# EAGLE board dev (EAGLE 4.16)
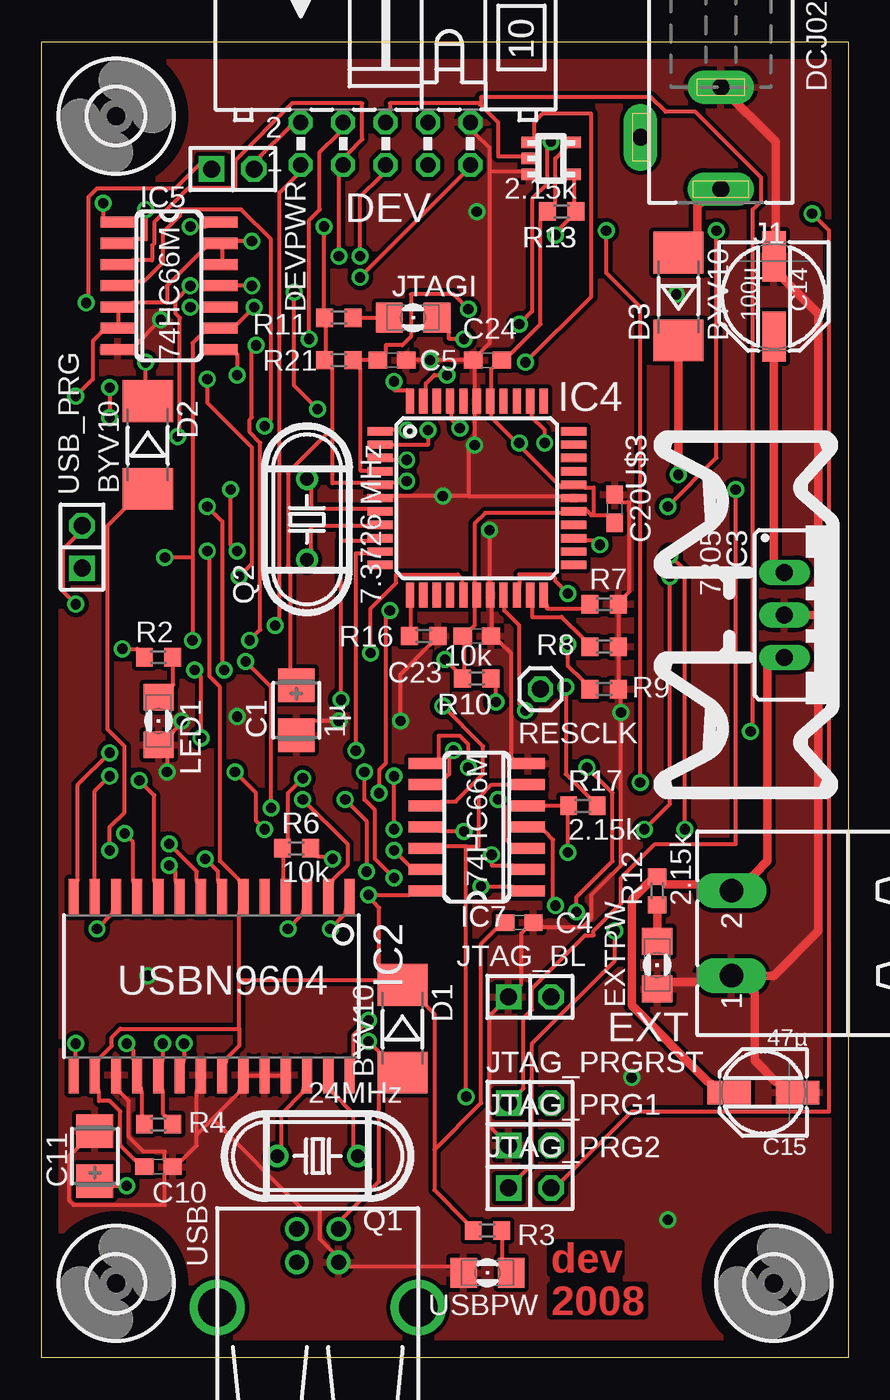
[diagram p0: board, top side]
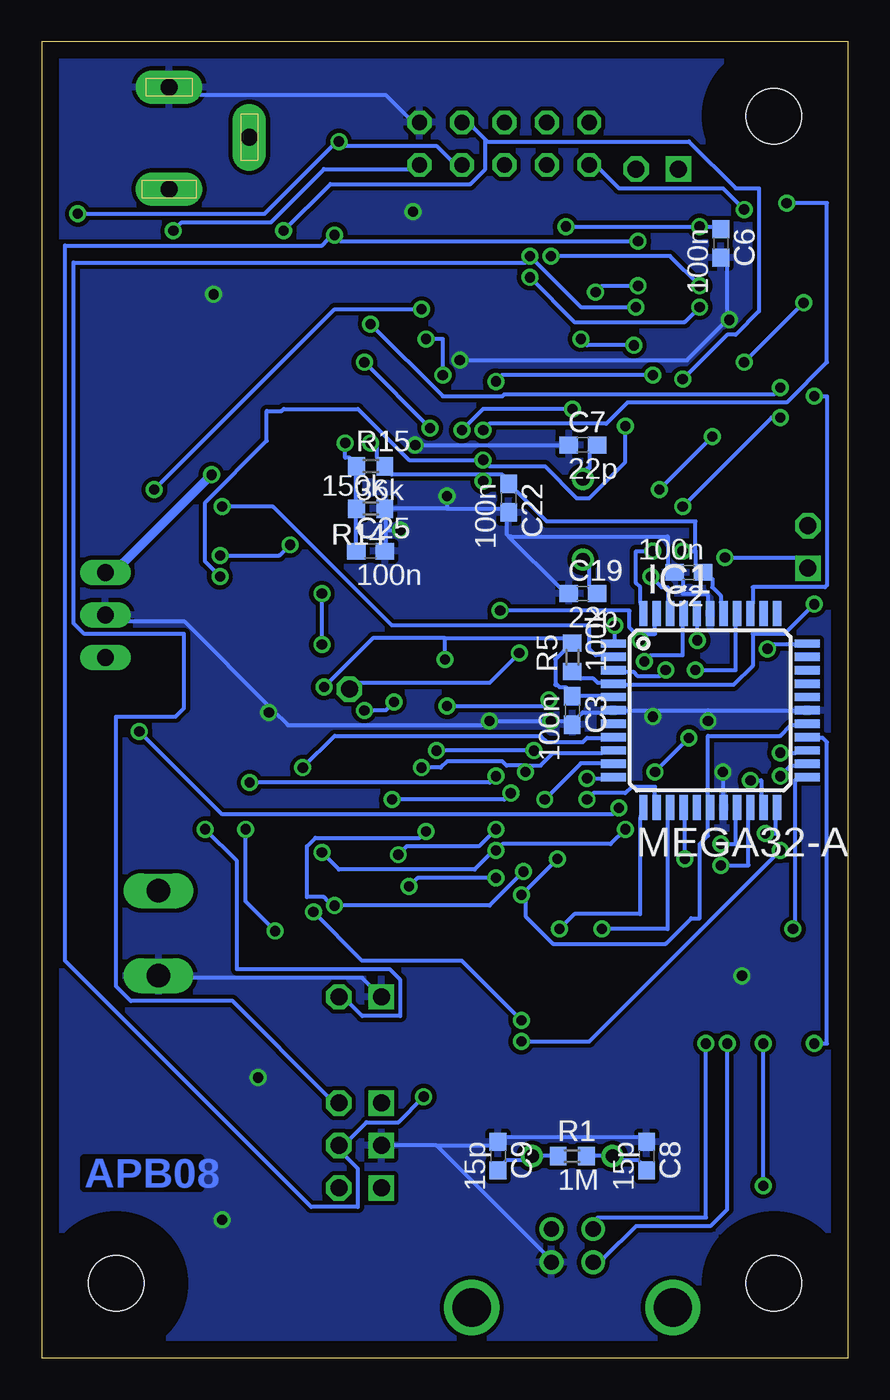
[diagram p1: board, bottom side, seen from below]

Size 48.26 x 78.74 mm. Coordinates in mm from the lower left corner, seen from the top.
Outline: 0,0 0,78.74 48.26,78.74 48.26,0 0,0
Copper layers (1*16): Top 0.035mm / dielectric 1.5mm / Bottom 0.035mm
Design rules "olimex": minimum track width 10mil, minimum drill 24mil, track to track 10mil, track to pad 10mil, pad to pad 10mil, via to via 10mil, smd to smd 10mil, copper to edge 40mil, drill to drill 10mil, minimum pad ring 10mil, minimum via ring 8mil, stop-mask expansion 0mil, vias tented up to drill 0mil, thermal gap 10mil
Net classes: 1 supply: width 0.508 mm

## Footprints (pad centres in the part's own frame; a part is rotated, then mirrored left to right if it is on the bottom)
CT3528 = smd 2 x 2.2: + 1.5,0; - -1.5,0
C0603 = smd 1.1 x 1: 1 -0.85,0; 2 0.85,0
PANASONIC_D = smd 3 x 1.4: + 2.4,0; - -2.4,0
PANASONIC_C = smd 2.6 x 1.4: + 2.05,0; - -2.05,0
MELF-MLL41 = smd 2.5 x 3: A 2.625,0; C -2.625,0
ML10L = drill 0.914 octagon: 1 -5.08,-1.27; 2 -5.08,1.27; 3 -2.54,-1.27; 4 -2.54,1.27; 5 0,-1.27; 6 0,1.27; 7 2.54,-1.27; 8 2.54,1.27; 9 5.08,-1.27; 10 5.08,1.27
1X02 = drill 1.016 square: 1 -1.27,0 | drill 1.016 octagon: 2 1.27,0
MSTBA2 = drill 1.397 long: 1 -2.54,5.08; 2 2.54,5.08
1206 = smd 1.6 x 1.803: A -1.422,0; C 1.422,0
3,3 = hole 3.3: 0,0
TQFP44 = smd 1.5 x 0.5: 1 -5.8,4; 2 -5.8,3.2; 3 -5.8,2.4; 4 -5.8,1.6; 5 -5.8,0.8; 6 -5.8,0; 7 -5.8,-0.8; 8 -5.8,-1.6; 9 -5.8,-2.4; 10 -5.8,-3.2; 11 -5.8,-4; 23 5.8,-4; 24 5.8,-3.2; 25 5.8,-2.4; 26 5.8,-1.6; 27 5.8,-0.8; 28 5.8,0; 29 5.8,0.8; 30 5.8,1.6; 31 5.8,2.4; 32 5.8,3.2; 33 5.8,4 | smd 0.5 x 1.5: 12 -4,-5.8; 13 -3.2,-5.8; 14 -2.4,-5.8; 15 -1.6,-5.8; 16 -0.8,-5.8; 17 0,-5.8; 18 0.8,-5.8; 19 1.6,-5.8; 20 2.4,-5.8; 21 3.2,-5.8; 22 4,-5.8; 34 4,5.8; 35 3.2,5.8; 36 2.4,5.8; 37 1.6,5.8; 38 0.8,5.8; 39 0,5.8; 40 -0.8,5.8; 41 -1.6,5.8; 42 -2.4,5.8; 43 -3.2,5.8; 44 -4,5.8
SO28-3 = smd 0.61 x 2.21: 1 -8.255,-5.315; 2 -6.985,-5.315; 3 -5.715,-5.315; 4 -4.445,-5.315; 5 -3.175,-5.315; 6 -1.905,-5.315; 7 -0.635,-5.315; 8 0.635,-5.315; 9 1.905,-5.315; 10 3.175,-5.315; 11 4.445,-5.315; 12 5.715,-5.315; 13 6.985,-5.315; 14 8.255,-5.315; 15 8.255,5.315; 16 6.985,5.315; 17 5.715,5.315; 18 4.445,5.315; 19 3.175,5.315; 20 1.905,5.315; 21 0.635,5.315; 22 -0.635,5.315; 23 -1.905,5.315; 24 -3.175,5.315; 25 -4.445,5.315; 26 -5.715,5.315; 27 -6.985,5.315; 28 -8.255,5.315
78XXS = drill 1.016 long: GND 0,-2.54; IN -2.54,-2.54; OUT 2.54,-2.54
SO14 = smd 0.66 x 2.032: 1 -3.81,-3.073; 2 -2.54,-3.073; 3 -1.27,-3.073; 4 0,-3.073; 5 1.27,-3.073; 6 2.54,-3.073; 7 3.81,-3.073; 8 3.81,3.073; 9 2.54,3.073; 10 1.27,3.073; 11 0,3.073; 12 -1.27,3.073; 13 -2.54,3.073; 14 -3.81,3.073
SOT23-5 = smd 0.69 x 0.99: 1 -0.95,-1.29; 2 0,-1.29; 3 0.95,-1.29; 4 0.95,1.3; 5 -0.95,1.3
DCJ0202 = drill 1 pad 2 long: 1 0,3.1; 2 4.8,0; 3 0,-3
HC49U70 = drill 0.813 round: 1 -2.413,0; 2 2.413,0
R0603 = smd 1 x 1.1: 1 -0.85,0; 2 0.85,0
1X01 = drill 1.016 octagon: 1 0,0
USB-B-H = drill 0.914 round: D+ 0,1.25; D- 1.981,1.25; GND 0,-1.25; VBUS 1.981,-1.25 | drill 2.286 round: P$1 -2.718,-6.02; P$2 -2.718,6.02

## Placement (x,y rotation side)
C1  1µ  [CT3528]  15.24,38.73 90 top
C2  100n  [C0603]  9.53,46.99 180 bottom
C3  100n  [C0603]  16.51,38.73 270 bottom
C4  100n  [C0603]  28.57,26.04 0 top
C5  100n  [C0603]  20.95,59.69 0 top
C6  100n  [C0603]  7.62,66.67 270 bottom
C7  22p  [C0603]  15.88,54.61 0 bottom
C8  15p  [C0603]  12.06,12.06 270 bottom
C9  15p  [C0603]  20.95,12.06 270 bottom
C10  100n  [C0603]  6.99,11.43 0 top
C11  1µ  [CT3528]  3.17,12.06 270 top
C14  100µ  [PANASONIC_D]  43.81,63.5 270 top
C15  47µ  [PANASONIC_C]  43.18,15.88 180 top
C19  22p  [C0603]  15.88,45.72 0 bottom
C20  100n  [C0603]  34.29,50.8 90 top
C22  100n  [C0603]  20.32,51.44 270 bottom
C23  100n  [C0603]  26.04,43.18 0 top
C24  100n  [C0603]  26.67,59.69 180 top
C25  100n  [C0603]  28.57,48.26 0 bottom
D1  BYV10  [MELF-MLL41]  21.59,19.68 270 top
D2  BYV10  [MELF-MLL41]  6.35,54.61 270 top
D3  BYV10  [MELF-MLL41]  38.1,63.5 90 top
DEV  [ML10L]  20.57,72.64 0 top
DEVPWR  [1X02]  11.43,71.12 0 top
EXT  MSTBA2  [MSTBA2]  46.35,25.4 90 top
EXTPW  [1206]  36.83,23.5 270 top
H1  MOUNT-HOLE3.3  [3,3]  4.45,74.3 0 top
H2  MOUNT-HOLE3.3  [3,3]  4.45,4.45 0 top
H3  MOUNT-HOLE3.3  [3,3]  43.81,4.45 0 top
IC1  MEGA32-A  [TQFP44]  8.26,38.73 0 bottom
IC2  USBN9604  [SO28-3]  10.16,22.23 180 top
IC3  7805  [78XXS]  46.99,44.45 270 top
IC4  MEGA16-A  [TQFP44]  26.04,51.44 0 top
IC5  74HC66M  [SO14]  7.62,64.14 270 top
IC6  74HC1G66DBV  [SOT23-5]  30.48,71.75 270 top
IC7  74HC66M  [SO14]  26.04,31.75 90 top
J1  DCJ0202  [DCJ0202]  40.64,73.03 180 top
JTAG_BL  [1X02]  29.21,21.59 0 top
JTAG_PRG1  [1X02]  29.21,12.7 0 top
JTAG_PRG2  [1X02]  29.21,10.16 0 top
JTAG_PRGRST  [1X02]  29.21,15.24 0 top
JTAGI  [1206]  22.23,62.23 0 top
LED1  [1206]  6.99,38.1 270 top
Q1  24MHz  [HC49U70]  16.51,12.06 180 top
Q2  7.3726 MHz  [HC49U70]  15.88,50.16 90 top
R1  1M  [R0603]  16.51,12.06 0 bottom
R2  2.15k  [R0603]  6.99,41.91 180 top
R3  2.15k  [R0603]  26.67,7.62 180 top
R4  1.5k  [R0603]  6.99,13.97 0 top
R5  100k  [R0603]  16.51,41.91 90 bottom
R6  10k  [R0603]  15.24,30.48 0 top
R7  10k  [R0603]  33.66,45.09 0 top
R8  10k  [R0603]  33.66,42.55 0 top
R9  10k  [R0603]  33.66,40.01 0 top
R10  10k  [R0603]  26.04,40.64 180 top
R11  2.15k  [R0603]  17.78,62.23 180 top
R12  2.15k  [R0603]  36.83,27.94 90 top
R13  2.15k  [R0603]  31.11,68.58 180 top
R14  150k  [R0603]  28.57,50.8 180 bottom
R15  36k  [R0603]  28.57,53.34 0 bottom
R16  10k  [R0603]  22.86,43.18 0 top
R17  2.15k  [R0603]  32.38,33.02 0 top
R21  10k  [R0603]  17.78,59.69 0 top
RESCLK  [1X01]  29.84,40.01 0 top
U$3  [PF752]  46.99,44.45 270 top
USB  USB-B-H  [USB-B-H]  16.51,5.71 90 top
USB_PRG  [1X02]  2.41,48.51 90 top
USBPW  [1206]  26.67,5.08 180 top

## Library data of the parts
C1-C11 C14 C15 C19 C20 C22-C25 R1-R17 R21 = rcl
D1-D3 = diode
DEV = con-harting-ml
DEVPWR JTAG_BL JTAG_PRG1 JTAG_PRG2 JTAG_PRGRST RESCLK USB_PRG = pinhead
EXT = con-phoenix-508
EXTPW JTAGI LED1 USBPW = led
H1-H3 = holes
IC1 = avr
IC2 = bene
IC3 = v-reg
IC4 = atmel
IC5-IC7 = apbteam_logic
J1 = con-jack
Q1 Q2 = crystal
U$3 = heatsink
USB = con-usb

## Nets
AREF: IC1.29
GND: C1.- C2.2 C3.2 C4.2 C5.2 C6.2 C7.1 C8.1 C9.1 C10.2 C11.- C14.- C15.- C19.1 C20.2 C22.2 C23.2 C24.2 C25.2 DEV.10 EXT.1 EXTPW.C IC1.6 IC1.18 IC1.28 IC1.39 IC2.17 IC2.21 IC2.23 IC2.24 IC2.25 IC3.GND IC4.6 IC4.18 IC4.28 IC4.39 IC5.7 IC6.3 IC7.7 J1.3 JTAG_BL.1 JTAG_PRG1.1 LED1.C R7.2 R8.2 R9.2 R14.1 R16.2 USB.GND USBPW.C
JTAG_PRGRST: C5.1 IC4.4 JTAG_PRGRST.1 R21.2
JTAG_RST: IC4.44 IC5.8
JTAG_RX: IC4.9 IC7.10
JTAG_TCK: IC4.3 IC5.4 JTAG_PRG2.1
JTAG_TDI: IC4.1 IC5.1
JTAG_TDO: IC4.2 IC5.11
JTAG_TMS: IC4.41 IC6.1
JTAG_TX: IC4.10 IC7.9
N$1: D1.A D2.A USB.VBUS
N$2: DEV.2 DEVPWR.2
N$3: D2.C DEVPWR.1
N$4: IC1.8 IC2.28
N$7: C11.+ IC2.18 R4.1
N$8: C8.2 IC2.26 Q1.2 R1.2
N$9: LED1.A R2.1
N$10: R3.1 USBPW.A
N$11: C9.2 IC2.27 Q1.1 R1.1
N$12: IC2.19 R4.2 USB.D+
N$13: IC4.22 R7.1
N$14: IC4.21 R8.1
N$15: IC2.20 USB.D-
N$16: IC4.20 R9.1
N$17: IC4.19 R10.1
N$18: JTAGI.A R11.1
N$21: IC4.16 RESCLK.1
N$22: IC4.12 R16.1
N$23: C25.1 IC4.35 R14.2 R15.1
N$24: IC4.25 JTAG_BL.2
N$27: D3.A J1.1
N$32: IC4.43 JTAGI.C
N$33: C14.+ D3.C IC3.IN
N$36: EXTPW.A R12.1
N$53: C7.2 IC4.7 Q2.2
N$54: C19.2 IC4.8 Q2.1
PA0: IC1.37 IC7.5 IC7.13 R17.1
PA1: IC1.36 IC5.5 IC5.6 IC5.12 IC5.13 IC6.4 IC7.6 IC7.12 JTAG_PRG1.2 R13.1
PA2: IC1.35
PA3: IC1.34
PA4: IC1.33 R2.2
PA5: IC1.32
PA6: IC1.31
PA7: IC1.30
PB0: DEV.5 IC1.40 IC5.9 JTAG_PRGRST.2 USB_PRG.1
PB1: DEV.6 IC1.41 IC6.2
PB2: DEV.8 IC1.42 IC7.2
PB3: DEV.4 IC1.43 IC7.3
PB4: DEV.3 IC1.44 IC5.3
PB5: DEV.1 IC1.1 IC5.2
PB6: DEV.9 IC1.2 IC5.10
PB7: DEV.7 IC1.3 JTAG_PRG2.2
PC0: IC1.19 IC2.8
PC1: IC1.20 IC2.9
PC2: IC1.21 IC2.10
PC3: IC1.22 IC2.11
PC4: IC1.23 IC2.12
PC5: IC1.24 IC2.13
PC6: IC1.25 IC2.14
PC7: IC1.26 IC2.15
PD0: IC1.9 IC7.1 IC7.8
PD1: IC1.10 IC7.4 IC7.11
PD2: IC1.11 IC2.4 R6.1
PD3: IC1.12 IC2.1
PD4: IC1.13 IC2.2
PD5: IC1.14 IC2.3
PD6: IC1.15 IC2.7
PD7: IC1.16
RESET: IC1.4 R5.1 USB_PRG.2
V+ [supply]: C15.+ EXT.2 IC3.OUT R12.2
VCC: C1.+ C2.1 C3.1 C4.1 C6.1 C10.1 C20.1 C22.1 C23.1 C24.1 D1.C IC1.5 IC1.17 IC1.27 IC1.38 IC2.6 IC2.16 IC2.22 IC4.5 IC4.17 IC4.27 IC4.29 IC4.38 IC5.14 IC6.5 IC7.14 R3.2 R5.2 R6.2 R10.2 R11.2 R13.2 R15.2 R17.2 R21.1

## Tracks (layer width: path | path; a pad name or v marks a point on that pad's centre or on a via)
GND  (via drill 0.61)
  Top 0.254: IC7.7 28.19,35.81 28.07,35.94 28.07,42.16 27.43,42.8 C23.2 26.92,43.56 26.92,44.96 IC4.18 26.8,46.35 v26.8,49.53 | v7.11,62.1 5.46,60.45 IC5.7 | 26.8,70.99 28.7,70.99 IC6.3 | 26.8,70.99 26.8,72.39 25.91,73.28 DEV.10 | C5.2 v23.24,59.69 C24.2 | 25.53,51.56 v24,51.56 20.95,51.56 IC4.6 | 25.53,51.56 25.53,54.36 v25.91,54.61 25.91,56.52 IC4.39 25.91,57.91 25.91,59.31 C24.2 | 25.53,51.56 31.11,51.56 IC4.28 | 26.8,70.99 26.8,60.71 26.29,60.2 26.29,60.07 C24.2 | v7.49,35.05 7.49,35.94 LED1.C 7.87,37.47 8.38,37.97 v8.38,38.1 | v21.46,38.1 21.46,40.89 23.24,42.67 R16.2 | v17.78,38.1 16.26,38.1 C1.- | IC2.25 14.35,16.89 13.59,16.89 IC2.24 13.08,16.89 12.32,16.89 IC2.23 11.81,15.88 10.22,14.29 | 9.27,13.34 9.27,15.88 IC2.21 | 9.27,13.34 9.27,12.7 8.38,11.81 C10.2 | C11.- 2.16,12.57 1.65,12.06 1.65,9.4 1.91,9.14 7.37,9.14 7.37,11.05 C10.2 | IC2.17 4.7,15.88 5.21,15.37 5.21,13.21 6.1,12.32 7.37,12.32 7.37,11.81 C10.2 | 9.27,13.34 10.22,14.29 | 37.72,22.48 EXTPW.C | USBPW.C 24.51,5.46 18.41,5.46 USB.GND 17.4,6.35 16.64,7.11 16.64,8.89 15.62,8.89 10.22,14.29 | C20.2 34.67,51.18 35.18,51.18 35.18,45.85 34.92,45.59 R7.2 34.54,44.58 34.54,43.05 R8.2 34.54,42.04 34.54,40.51 R9.2 34.67,39.5 v34.67,38.61 34.67,29.46 32.89,27.69 32.89,26.29 32.38,25.78 29.97,25.78 C4.2 28.96,25.65 28.7,25.4 28.7,22.35 JTAG_BL.1 26.8,20.45 26.8,13.84 JTAG_PRG1.1
  Top 0.508: J1.3 43.94,72.77 43.94,67.31 C14.- 44.45,64.52 46.48,62.48 46.48,44.45 | 46.48,44.45 IC3.GND | 37.72,22.48 39.24,22.48 EXT.1 | C15.- 43.94,16.51 42.67,17.78 42.67,21.84 EXT.1 | 46.48,44.45 46.48,25.53 43.81,22.86 EXT.1
  Bottom 0.254: IC1.39 8.38,45.21 8.38,45.59 8.51,45.72 9.91,45.72 9.91,46.61 C2.2 10.79,47.37 10.79,49.15 20.19,49.15 20.26,49.09 | 27.69,49.53 27.69,50.29 R14.1 24,50.8 | 27.69,49.53 27.69,48.64 C25.2 | 20.26,49.09 20.45,49.28 20.45,50.04 C22.2 20.7,50.8 24,50.8 | 20.26,49.09 17.27,46.1 C19.1 | 27.69,49.53 v26.8,49.53 | C6.2 7.24,65.28 7.24,62.1 v7.11,62.1 7.49,61.85 9.65,59.69 v23.24,59.69 | v25.91,54.61 C7.1 | v24,51.56 24,50.8 | v7.49,35.05 7.49,33.66 IC1.18 | 8.38,38.73 IC1.28 | 8.38,38.73 IC1.6 14.73,38.61 15.88,38.61 16.13,38.35 C3.2 16.89,38.1 v17.78,38.1 v21.46,38.1 21.84,37.85 33.53,37.85 34.48,38.8 | 8.38,38.73 v8.38,38.1 | 34.48,38.8 39.75,44.07 43.05,44.07 IC3.GND | DEV.10 26.29,74.17 27.69,75.56 38.73,75.56 J1.3 | C8.1 12.45,13.21 20.57,13.21 C9.1 21.34,12.7 24.64,12.7 | 24.64,12.7 JTAG_PRG1.1 | 24.64,12.7 18.16,6.22 USB.GND | EXT.1 39.24,22.73 29.08,22.73 JTAG_BL.1 | 34.48,38.8 v34.67,38.61
  other vias: 6.35,22.86 37.47,8.26 26.04,68.58 35.31,16.76 37.97,63.63 11.68,38.35
  pour Top (isolate 0.254): 0,78.74 48.26,78.74 48.26,0 0,0
  pour Bottom (isolate 0.254): 0,78.74 48.26,78.74 48.26,0 0,0
JTAG_PRGRST  (via drill 0.61)
  Top 0.254: IC4.4 19.56,53.09 19.05,53.09 19.05,59.18 R21.2 C5.1 20.57,60.07 20.57,60.58 21.59,60.58 22.1,61.09 22.1,63.63 24.64,63.63 v25.53,62.74 | v41.53,51.94 41.53,30.73 36.7,30.73 34.67,28.7 34.67,27.18 33.02,25.53 33.02,25.27 32.51,25.27 29.34,22.1 29.34,20.83 28.83,20.32 28.83,16.13 JTAG_PRGRST.1
  Bottom 0.254: v41.53,51.94 30.73,62.74 v25.53,62.74
JTAG_RST  (via drill 0.61)
  Top 0.254: v21.08,58.42 21.08,57.91 21.84,57.91 IC4.44 | v11.68,58.8 11.68,60.07 IC5.8
  Bottom 0.254: v21.08,58.42 20.7,58.8 v11.68,58.8
JTAG_RX  (via drill 0.61)
  Top 0.254: v17.91,39.37 17.91,48.9 19.56,48.9 IC4.9 | v24,38.99 26.42,36.58 26.42,34.92 24.77,33.27 23.88,33.27 IC7.10
  Bottom 0.254: v17.91,39.37 18.29,38.99 v24,38.99
JTAG_TCK  (via drill 0.61)
  Top 0.254: v21.84,53.72 20.95,53.72 IC4.3 | v13.34,55.75 13.72,56.13 13.72,66.93 11.94,68.71 8.26,68.71 8.26,68.33 7.24,67.31 7.24,65.53 6.1,64.39 5.46,64.39 IC5.4 | v34.29,25.53 34.29,23.75 29.34,18.8 29.34,11.56 JTAG_PRG2.1 | v36.07,31.62 37.59,33.15 v37.59,46.74
  Bottom 0.254: v13.34,55.75 13.34,53.59 15.49,51.44 16.26,51.44 18.16,53.34 21.46,53.34 v21.84,53.72 26.29,53.72 29.34,56.77 33.78,56.77 33.91,56.64 34.8,56.64 34.8,54.86 38.48,51.18 38.48,47.62 v37.59,46.74 | v34.29,25.53 36.07,27.3 v36.07,31.62
JTAG_TDI  (via drill 0.61)
  Top 0.254: v21.84,55.5 20.95,55.5 IC4.1 | v3.68,69.09 3.68,68.2 IC5.1
  Bottom 0.254: v21.84,55.5 21.46,55.88 14.48,55.88 13.21,57.15 3.68,57.15 1.27,59.56 1.27,69.09 v3.68,69.09
JTAG_TDO  (via drill 0.61)
  Top 0.254: v23.11,55.5 23.11,54.61 20.95,54.61 IC4.2 | v16.51,56.77 15.11,58.17 v15.11,63.75 | v12.57,64.14 IC5.11
  Bottom 0.254: v23.11,55.5 21.84,56.77 v16.51,56.77 | v15.11,63.75 14.73,64.14 v12.57,64.14
JTAG_TMS  (via drill 0.61)
  Top 0.254: v28.96,59.56 32.89,63.5 32.89,74.42 29.97,74.42 29.46,73.91 29.46,73.03 IC6.1 | v25.02,55.63 24.51,56.13 24.51,56.52 IC4.41
  Bottom 0.254: v25.02,55.63 v28.96,59.56
JTAG_TX  (via drill 0.61)
  Top 0.254: v18.8,36.32 18.8,48.13 19.56,48.13 IC4.10 | v24.64,36.32 24.38,36.07 24.38,34.92 23.88,34.42 IC7.9
  Bottom 0.254: v18.8,36.32 v24.64,36.32
N$1  (via drill 0.61)
  Top 0.254: USB.VBUS 18.03,8.38 20.19,10.54 20.19,15.88 D1.A 20.19,18.29 v19.56,18.92 | v4.06,30.35 4.06,31.75 4.95,32.64 4.95,36.58 3.94,37.59 3.94,49.78 4.95,50.8 D2.A
  Bottom 0.254: v4.06,30.35 15.49,18.92 v19.56,18.92
N$2
  Top 0.254: DEV.2 14.86,73.66 13.08,71.88 13.08,71.75 DEVPWR.2
N$3  (via drill 0.61)
  Top 0.254: v6.22,59.56 6.22,58.42 D2.C | v2.67,63.12 2.79,63.25 2.79,69.47 3.3,69.98 8,69.98 9.53,71.5 DEVPWR.1
  Bottom 0.254: v6.22,59.56 v2.67,63.12
N$4  (via drill 0.61)
  Top 0.254: v32.64,35.31 34.16,33.78 34.16,29.72 32,27.56 v32,26.67 | v19.56,20.19 18.67,19.3 18.67,17.91 IC2.28
  Bottom 0.254: v32.64,35.31 30.73,37.21 18.41,37.21 18.03,36.83 15.88,36.83 15.62,37.08 14.73,37.08 IC1.8 | v32,26.67 29.08,23.75 23.11,23.75 v19.56,20.19
N$7  (via drill 0.61)
  Top 0.254: R4.1 5.97,14.48 5.97,15.88 IC2.18 5.46,17.91 5.46,18.41 v5.08,18.8 | v5.08,10.29 4.19,10.29 C11.+
  Bottom 0.254: v5.08,10.29 v5.08,18.8
N$8
  Top 0.254: IC2.26 15.62,15.88 14.35,14.61 14.35,12.7 Q1.2
  Bottom 0.254: C8.2 12.45,11.68 12.57,11.81 13.46,11.81 Q1.2 R1.2
N$9
  Top 0.254: R2.1 7.87,41.4 7.87,40.26 LED1.A
N$10
  Top 0.254: R3.1 27.56,7.11 27.56,5.97 USBPW.A
N$11
  Top 0.254: IC2.27 17.4,15.88 18.67,14.61 18.67,12.7 Q1.1
  Bottom 0.254: R1.1 Q1.1 19.56,11.81 20.45,11.81 20.57,11.68 C9.2
N$12  (via drill 0.61)
  Top 0.254: R4.2 7.37,14.48 7.24,14.61 7.24,15.88 IC2.19 7.24,17.91 v7.24,18.8
  Bottom 0.254: v7.24,18.8 7.24,8.89 8.26,7.87 12.7,7.87 14.61,5.97 USB.D+
N$13
  Top 0.254: R7.1 32.38,44.83 30.23,44.83 30.23,44.96 IC4.22
N$14
  Top 0.254: R8.1 32.38,43.05 31.11,44.32 29.34,44.32 29.34,44.96 IC4.21
N$15  (via drill 0.61)
  Top 0.254: v8.51,18.8 8.51,17.91 IC2.20
  Bottom 0.254: v8.51,18.8 8.51,8.38 14.99,8.38 USB.D-
N$16  (via drill 0.61)
  Top 0.254: v31.5,42.67 31.5,41.4 32.38,40.51 R9.1 | v31.5,45.72 30.73,46.48 30.73,46.61 30.48,46.86 28.57,46.86 28.57,46.35 IC4.20
  Bottom 0.254: v31.5,42.67 v31.5,45.72
N$17  (via drill 0.61)
  Top 0.254: v27.18,39.24 27.18,40.13 R10.1 | v28.96,38.73 28.57,39.12 28.57,43.81 27.69,44.7 27.69,44.96 IC4.19
  Bottom 0.254: v27.18,39.24 27.69,38.73 v28.96,38.73
N$18
  Top 0.254: R11.1 JTAGI.A
N$21  (via drill 0.61)
  Top 0.254: v19.68,42.16 19.68,44.83 21.21,46.35 21.21,46.86 24.89,46.86 25.15,46.61 25.15,46.35 IC4.16
  Bottom 0.254: v19.68,42.16 21.46,40.39 29.21,40.39 RESCLK.1
N$22
  Top 0.254: R16.1 22.1,43.69 22.1,44.96 IC4.12
N$23  (via drill 0.61)
  Top 0.254: v30.1,54.74 30.1,55.5 29.34,56.26 29.34,56.52 IC4.35
  Bottom 0.254: C25.1 29.46,48.64 29.46,50.29 R14.2 29.46,51.31 29.46,52.83 R15.1 29.84,53.85 30.1,53.85 v30.1,54.74
N$24  (via drill 0.61)
  Top 0.254: v33.4,48.64 33.4,48.9 32.51,48.9 IC4.25 | v37.59,48.01 38.48,47.12 v38.48,31.62
  Bottom 0.254: v33.4,48.64 34.04,48.01 v37.59,48.01 | v38.48,31.62 36.58,29.72 36.58,23.24 27.43,23.24 26.8,22.61 26.8,20.45 29.08,20.45 29.84,21.21 JTAG_BL.2
N$27
  Top 0.508: D3.A 39.24,67.31 39.24,68.96 J1.1
N$32  (via drill 0.61)
  Top 0.254: v24.26,58.8 23.5,58.8 22.99,58.29 22.99,57.91 IC4.43 | v25.27,60.96 24.38,60.96 24.38,61.34 JTAGI.C
  Bottom 0.254: v24.26,58.8 24.26,60.96 v25.27,60.96
N$33  (via drill 0.61)
  Top 0.508: v38.1,52.83 D3.C | C14.+ 43.81,47.62 IC3.IN
  Bottom 0.508: v38.1,52.83 43.31,47.62 IC3.IN
N$36
  Top 0.508: EXTPW.A R12.1
N$53
  Top 0.254: IC4.7 19.56,50.8 16.13,50.8 16.13,51.94 Q2.2
  Bottom 0.254: C7.2 15.49,54.23 15.49,53.21 15.62,53.21 Q2.2
N$54
  Top 0.254: IC4.8 19.56,49.78 16.13,49.78 16.13,48.39 Q2.1
  Bottom 0.254: C19.2 15.49,46.1 15.49,47.24 Q2.1
PA0  (via drill 0.61)
  Top 0.254: IC7.5 R17.1 31.5,32.51 v31.5,30.23 | v9.14,41.15 9.53,40.77 v9.53,37.08 | v11.56,35.05 12.83,33.78 12.83,32.13 v13.34,31.62 | v21.08,30.35 21.97,29.46 IC7.13
  Bottom 0.254: v9.14,41.15 6.73,41.15 6.73,43.81 IC1.37 | v11.56,35.05 v9.53,37.08 | v13.34,31.62 14.22,30.73 20.7,30.73 v21.08,30.35 21.46,30.1 22.35,29.21 30.48,29.21 v31.5,30.23
PA1  (via drill 0.61)
  Top 0.254: 25.4,30.61 26.16,30.61 26.16,33.53 26.92,34.29 IC7.6 | 25.4,30.61 23.88,30.61 IC7.12 | v25.4,15.62 25.4,30.61 | v2.03,57.53 3.05,58.55 3.05,60.83 3.56,61.34 IC5.6 4.57,61.85 4.57,62.61 IC5.5 5.46,63.12 7.49,63.12 7.49,64.14 9.78,66.42 IC5.13 | IC6.4 31.88,70.48 31.88,69.09 R13.1 31.5,68.07 30.73,67.31 v30.73,67.18 | v12.57,66.8 11.68,66.8 IC5.13 | IC5.12 10.79,65.66 10.79,66.42 IC5.13
  Bottom 0.254: v25.4,15.62 26.92,14.1 28.83,14.1 29.84,13.08 JTAG_PRG1.2 30.1,12.06 29.34,11.3 29.34,9.02 32.13,9.02 46.86,23.75 46.86,66.55 31.5,66.55 31.11,66.93 v30.73,67.18 30.35,66.8 v12.57,66.8 | v2.03,57.53 1.27,57.53 1.27,46.23 1.4,46.1 5.71,46.1 5.71,45.21 IC1.36
PA4  (via drill 0.61)
  Top 0.254: v4.83,42.42 5.71,42.42 R2.2
  Bottom 0.254: v4.83,42.42 4.57,42.67 3.17,42.67 IC1.33
PB0  (via drill 0.61)
  Top 0.254: 9.02,47.88 9.02,60.71 9.78,61.47 IC5.9 11.68,61.85 v12.7,62.87 | 9.02,47.88 v9.02,42.93 | v19.05,65.91 19.05,69.47 20.32,70.74 DEV.5 | 9.02,47.88 v7.37,47.88
  Bottom 0.254: v9.02,42.93 9.02,43.81 IC1.40 | v12.7,62.87 16,62.87 v19.05,65.91 19.3,65.53 46.35,65.53 46.35,43.94 45.72,43.31 39.75,43.31 39.75,38.86 40.26,38.35 43.81,38.35 43.81,22.23 42.93,21.34 36.83,21.34 31.11,15.62 JTAG_PRGRST.2 | v7.37,47.88 3.05,47.88 USB_PRG.1
PB1  (via drill 0.61)
  Top 0.254: 26.23,74.99 26.16,75.06 20.83,75.06 20.83,74.55 DEV.6 | 26.23,74.99 27.3,73.91 27.3,71.88 28.7,71.88 IC6.2 | v12.19,41.66 13.72,40.13 v13.72,32.89 | v42.42,37.47 42.55,37.59 42.55,68.71 43.05,69.22 43.05,70.61 39.12,74.55 37.34,74.55 36.45,75.44 26.29,75.44 26.29,75.06 26.23,74.99
  Bottom 0.254: v12.19,41.66 11.81,42.04 9.91,42.04 9.91,43.81 IC1.41 | v13.72,32.89 14.1,32.51 37.47,32.51 v42.42,37.47
PB2  (via drill 0.61)
  Top 0.254: v11.81,46.74 12.57,47.5 12.57,54.48 9.91,57.15 v9.91,58.55 | v26.92,30.1 26.92,29.46 28.19,29.46 IC7.2 | v21.08,31.62 v21.08,34.8 | v35.81,34.42 35.81,62.87 33.78,64.9 v33.78,67.44
  Bottom 0.254: v11.81,46.74 11.18,46.1 10.79,46.1 10.79,45.21 IC1.42 | v9.91,58.55 7.24,61.21 6.73,61.21 5.33,62.61 5.33,69.98 6.73,69.98 9.53,72.77 21.59,72.77 21.65,72.83 | 21.65,72.83 22.48,73.66 DEV.8 | v26.92,30.1 26.42,30.61 22.1,30.61 v21.08,31.62 | v21.08,34.8 21.46,34.42 v35.81,34.42 | v33.78,67.44 30.99,70.23 22.61,70.23 21.72,71.12 21.72,72.77 21.65,72.83
PB3  (via drill 0.61)
  Top 0.254: v20.83,44.7 20.57,44.45 20.57,35.56 20.19,35.18 v20.19,33.78 | v27.3,33.4 27.69,33.02 27.69,31.11 28.19,30.61 IC7.3 | v16,60.96 16,68.07 16.64,68.71 16.64,72.14 17.78,73.28 DEV.4 | v12.83,60.58 12.57,60.33 12.57,56.26 12.45,56.13 12.45,55.37 13.08,54.74 13.08,43.56 v12.45,42.93
  Bottom 0.254: 12.45,43.31 12.7,43.31 13.08,43.69 13.08,44.7 v20.83,44.7 | 12.45,43.31 11.56,43.31 11.56,43.81 IC1.43 | v20.19,33.78 20.57,33.4 v27.3,33.4 | v16,60.96 15.62,60.58 v12.83,60.58 | v12.45,42.93 12.45,43.31
PB4  (via drill 0.61)
  Top 0.254: v11.68,48.26 11.3,48.64 v11.3,51.94 | v8.13,55.12 8.26,55.24 8.26,62.23 8,62.48 8,63.25 v8.89,64.14 | v17.78,65.91 17.78,70.74 DEV.3 18.29,72.01 19.18,72.9 19.18,75.06 14.99,75.06 11.56,71.63 11.56,69.98 8.76,69.98 6.73,67.94 6.73,66.67 6.6,66.55 6.6,65.66 5.46,65.66 IC5.3
  Bottom 0.254: v11.68,48.26 12.7,48.26 12.7,46.35 12.45,46.1 12.45,45.21 IC1.44 | v11.3,51.94 v8.13,55.12 | v8.89,64.14 10.67,65.91 v17.78,65.91
PB5  (via drill 0.61)
  Top 0.254: v13.97,43.81 14.22,44.07 14.22,69.72 15.24,70.74 DEV.1 | v6.22,68.71 6.22,66.93 5.46,66.93 IC5.2
  Bottom 0.254: v13.97,43.81 13.97,42.93 IC1.1 | v6.22,68.71 7.49,69.98 13.72,69.98 14.86,71.12 DEV.1
PB6  (via drill 0.61)
  Top 0.254: v37.47,50.93 40.39,53.85 v40.39,67.44 | v19.05,64.64 25.27,70.87 DEV.9 | v8.89,62.87 IC5.10
  Bottom 0.254: v37.47,50.93 34.42,50.93 27.3,43.81 15.49,43.81 15.49,42.42 15.11,42.04 14.73,42.04 IC1.2 | v40.39,67.44 39.88,67.94 34.54,67.94 31.37,71.12 26.29,71.12 DEV.9 | v8.89,62.87 9.78,61.98 16.38,61.98 v19.05,64.64
PB7  (via drill 0.61)
  Top 0.254: v10.92,41.15 10.79,41.27 10.79,50.04 v9.91,50.93 | v4.06,58.04 v4.06,56.26 | v28.57,61.85 29.34,62.61 29.34,69.34 30.23,70.23 30.23,72.52 v30.48,72.77 | v46.1,68.45 47.12,67.44 47.12,14.73 35.31,14.73 31.11,10.54 JTAG_PRG2.2
  Bottom 0.254: v10.92,41.15 11.3,40.77 12.57,40.77 12.83,41.02 13.34,41.02 IC1.3 | v9.91,50.93 4.57,56.26 v4.06,56.26 | v4.06,58.04 4.45,57.66 20.57,57.66 20.7,57.53 24.26,57.53 v28.57,61.85 | DEV.7 23.75,71.63 24.64,72.52 30.23,72.52 v30.48,72.77 30.86,72.52 34.92,68.45 v46.1,68.45
PC0  (via drill 0.61)
  Top 0.254: v7.62,30.73 9.27,29.08 9.27,28.57 IC2.8
  Bottom 0.254: v7.62,30.73 6.73,30.73 6.73,32.26 IC1.19
PC1  (via drill 0.61)
  Top 0.254: v7.62,29.46 8,29.08 8,28.57 IC2.9
  Bottom 0.254: v7.62,29.46 5.97,29.46 5.97,32.26 IC1.20
PC2  (via drill 0.61)
  Top 0.254: v5.84,34.54 6.73,33.66 6.73,28.57 IC2.10
  Bottom 0.254: v5.84,34.54 5.21,34.54 5.21,33.66 IC1.21
PC3  (via drill 0.61)
  Top 0.254: v4.95,31.37 5.46,30.86 5.46,28.57 IC2.11
  Bottom 0.254: v4.95,31.37 4.32,31.37 4.32,32.26 IC1.22
PC4  (via drill 0.61)
  Top 0.254: v3.3,25.65 4.19,26.54 IC2.12
  Bottom 0.254: v3.3,25.65 3.17,25.65 3.17,34.54 IC1.23
PC5  (via drill 0.61)
  Top 0.254: v4.06,34.8 3.17,33.91 IC2.13
  Bottom 0.254: v4.06,34.8 3.43,35.43 3.17,35.43 IC1.24
PC6  (via drill 0.61)
  Top 0.254: v4.06,36.2 2.16,34.29 2.16,28.57 IC2.14
  Bottom 0.254: v4.06,36.2 3.17,36.2 IC1.25
PC7  (via drill 0.61)
  Top 0.254: v2.03,18.8 2.03,17.91 IC2.15
  Bottom 0.254: v2.03,18.8 1.27,18.8 1.27,36.83 1.52,37.08 1.78,37.08 IC1.26
PD0  (via drill 0.61)
  Top 0.254: v25.53,35.31 25.53,36.7 25.02,37.21 23.75,37.21 23.75,35.81 IC7.8 | v26.29,28.19 28.19,28.19 IC7.1 | v21.08,28.7 19.94,29.84 19.94,32.77 19.3,33.4 v19.3,35.05
  Bottom 0.254: 19.3,35.43 20.45,35.43 20.7,35.69 24,35.69 24.38,35.31 v25.53,35.31 | 19.3,35.43 18.41,35.43 17.65,36.2 14.73,36.2 IC1.9 | v26.29,28.19 25.78,28.7 v21.08,28.7 | v19.3,35.05 19.3,35.43
PD1  (via drill 0.61)
  Top 0.254: v18.16,33.4 19.43,32.13 v19.43,29.08 | v30.73,27.05 30.61,27.18 30.61,30.99 30.1,31.5 IC7.4 | v25.27,31.5 23.88,31.5 IC7.11
  Bottom 0.254: v18.16,33.4 16,35.56 14.73,35.56 IC1.10 | v19.43,29.08 21.46,27.05 v30.73,27.05 31.11,27.3 31.37,27.56 32.38,27.56 32.38,30.61 31.88,31.11 25.65,31.11 v25.27,31.5
PD2  (via drill 0.61)
  Top 0.254: IC2.4 14.48,28.57 14.48,29.97 R6.1 14.73,30.99 14.73,33.78 v15.62,34.67
  Bottom 0.254: v15.62,34.67 14.73,34.67 IC1.11
PD3  (via drill 0.61)
  Top 0.254: v17.27,25.65 18.16,26.54 IC2.1
  Bottom 0.254: v17.27,25.65 16.38,26.54 12.45,26.54 12.45,32.26 IC1.12
PD4  (via drill 0.61)
  Top 0.254: v15.62,33.4 18.29,30.73 18.29,29.46 17.4,28.57 IC2.2
  Bottom 0.254: v15.62,33.4 15.24,33.78 13.34,33.78 12.95,34.16 11.56,34.16 11.56,33.66 IC1.13
PD5  (via drill 0.61)
  Top 0.254: v14.73,25.65 15.62,26.54 IC2.3
  Bottom 0.254: v14.73,25.65 10.79,25.65 10.79,32.26 IC1.14
PD6  (via drill 0.61)
  Top 0.254: v9.78,29.84 10.54,29.08 10.54,28.57 IC2.7
  Bottom 0.254: v9.78,29.84 9.78,32.26 IC1.15
RESET  (via drill 0.61)
  Top 0.254: v2.03,45.09 1.27,45.85 1.27,48.39 2.03,49.15 USB_PRG.2
  Bottom 0.254: R5.1 16,40.64 15.24,40.64 14.99,40.39 14.73,40.39 IC1.4 13.34,40.26 6.86,40.26 5.71,41.4 5.71,43.31 3.81,43.31 v2.03,45.09
V+
  Top 0.508: C15.+ 39.88,16.51 35.31,21.08 35.31,27.43 36.32,28.45 R12.2 37.34,28.32 39.24,28.32 EXT.2 42.67,28.96 43.43,29.72 43.43,41.27 IC3.OUT
VCC  (via drill 0.61)
  Top 0.254: C10.1 5.59,11.81 4.7,12.7 4.7,14.73 4.06,15.37 3.43,15.37 3.43,15.88 IC2.16 3.43,17.91 4.19,18.67 4.19,19.18 4.7,19.68 11.81,19.68 | 11.81,22.61 11.81,26.54 IC2.6 11.81,28.57 10.67,29.72 10.67,40.13 10.03,40.77 10.03,48.13 v9.91,48.26 | 11.81,19.68 11.81,22.61 | 11.81,19.68 11.81,18.67 11.05,17.91 IC2.22 | v17.4,29.84 17.4,29.97 16.51,29.97 R6.2 | IC7.14 21.97,27.69 v19.56,27.69 19.81,27.3 20.19,26.92 20.19,23.5 D1.C | 23.5,12.45 23.5,20.57 22.99,21.08 D1.C | 23.5,12.45 23.5,10.03 25.4,8.13 R3.2 | 23.5,12.45 26.29,15.24 26.29,24.77 27.18,25.65 C4.1 | 11.81,22.61 20.19,22.61 D1.C | v8.89,67.69 9.78,67.69 IC5.14 | 17.4,55.63 17.4,59.18 R21.1 17.02,60.2 17.02,61.72 R11.2 16.89,62.74 v16.89,67.69 | 17.4,55.63 17.4,52.32 19.56,52.32 IC4.5 20.95,52.32 21.84,52.32 v21.84,52.45 | 17.4,55.63 14.73,52.96 14.73,47.37 14.86,47.24 14.86,41.15 C1.+ | v31.37,40.13 31.37,34.92 32.77,33.53 R17.2 | IC6.5 31.37,72.39 30.73,71.75 30.73,69.09 R13.2 29.84,68.07 29.84,61.85 28.07,60.07 C24.1 27.05,59.31 26.92,59.18 26.92,57.91 IC4.38 26.92,56.52 26.92,56.26 28.51,54.67 | 33.02,50.42 32.89,50.42 32.51,50.8 IC4.27 31.11,50.55 26.54,50.55 25.91,49.91 25.91,46.35 IC4.17 25.91,44.96 25.91,43.81 25.65,43.56 C23.1 25.27,42.8 25.27,41.15 R10.2 24.77,41.15 v24.13,41.78 | 33.02,50.42 33.91,50.42 C20.1 | 33.02,50.42 33.02,52.07 32.51,52.07 IC4.29 31.11,52.07 28.51,54.67 | v28.57,54.74 28.51,54.67
  Bottom 0.254: IC1.27 3.17,37.85 3.43,37.85 4.06,37.21 8.38,37.21 8.38,33.66 IC1.17 8.38,32.26 8.38,31.24 8.89,30.73 8.89,26.29 9.4,26.29 10.92,24.77 17.65,24.77 19.3,26.42 19.3,27.3 v19.56,27.69 v17.4,29.84 | C6.1 8,67.69 v8.89,67.69 v16.89,67.69 | IC1.38 7.62,45.21 7.62,45.59 8.13,46.1 8.13,46.61 C2.1 9.14,47.37 9.14,48.26 | 21.84,52.83 27.3,52.83 R15.2 28.19,53.85 28.19,54.74 v28.57,54.74 | 21.84,52.83 20.7,52.83 C22.1 19.94,51.82 19.81,51.82 18.03,50.04 9.14,50.04 9.14,48.26 | IC1.5 14.73,39.62 16.13,39.62 C3.1 16.89,40.13 17.27,40.13 17.4,40.26 17.53,40.26 17.53,41.78 17.02,42.29 R5.2 17.02,43.05 24.13,43.05 | v31.37,40.13 28.45,43.05 24.13,43.05 | v24.13,41.78 24.13,43.05 | 21.84,52.83 v21.84,52.45 | v9.91,48.26 9.14,48.26

## Text on the board
Top: dev | 2008
Bottom: APB08
tNames: DCJ0202 | 10 | 2 | 1 | 2.15k | IC5 | 74HC66M | R13 | J1 | 100µ | C14 | JTAGI | D3 | BYV10 | BYV10 | D2 | U$3 | 7805 | IC3 | Q2 | 7.3726 MHz | 10k | R10 | LED1 | C1 | 1µ | R17 | R6 | 2.15k | 10k | 74HC66M | IC7 | R12 | 2.15k | IC2 | 2 | USBN9604 | BYV10 | D1 | 1 | 47µ | 24MHz | JTAG_PRGRST | JTAG_PRG1 | C15 | JTAG_PRG2 | Q1
bNames: C6 | 100n | C7 | R15 | 22p | 150k | C22 | 100n | 36k | R14 | 100n | C25 | C2 | IC1 | C19 | 100n | 22p | 100k | R5 | C3 | 100n | MEGA32-A | C8 | 15p | R1 | C9 | 15p | 1M